# Altium PCB STM32F302VC_EVM.PcbDoc (part 15 of 19)
Units mil, origin at the board's own origin, x right, y up, seen from the top; angles counter-clockwise.
Board outline 3937.01 x 3937.01 mil, 2 copper layers (Top Layer, Bottom Layer); 117 components, 166 nets, 602 pads, 373 vias.
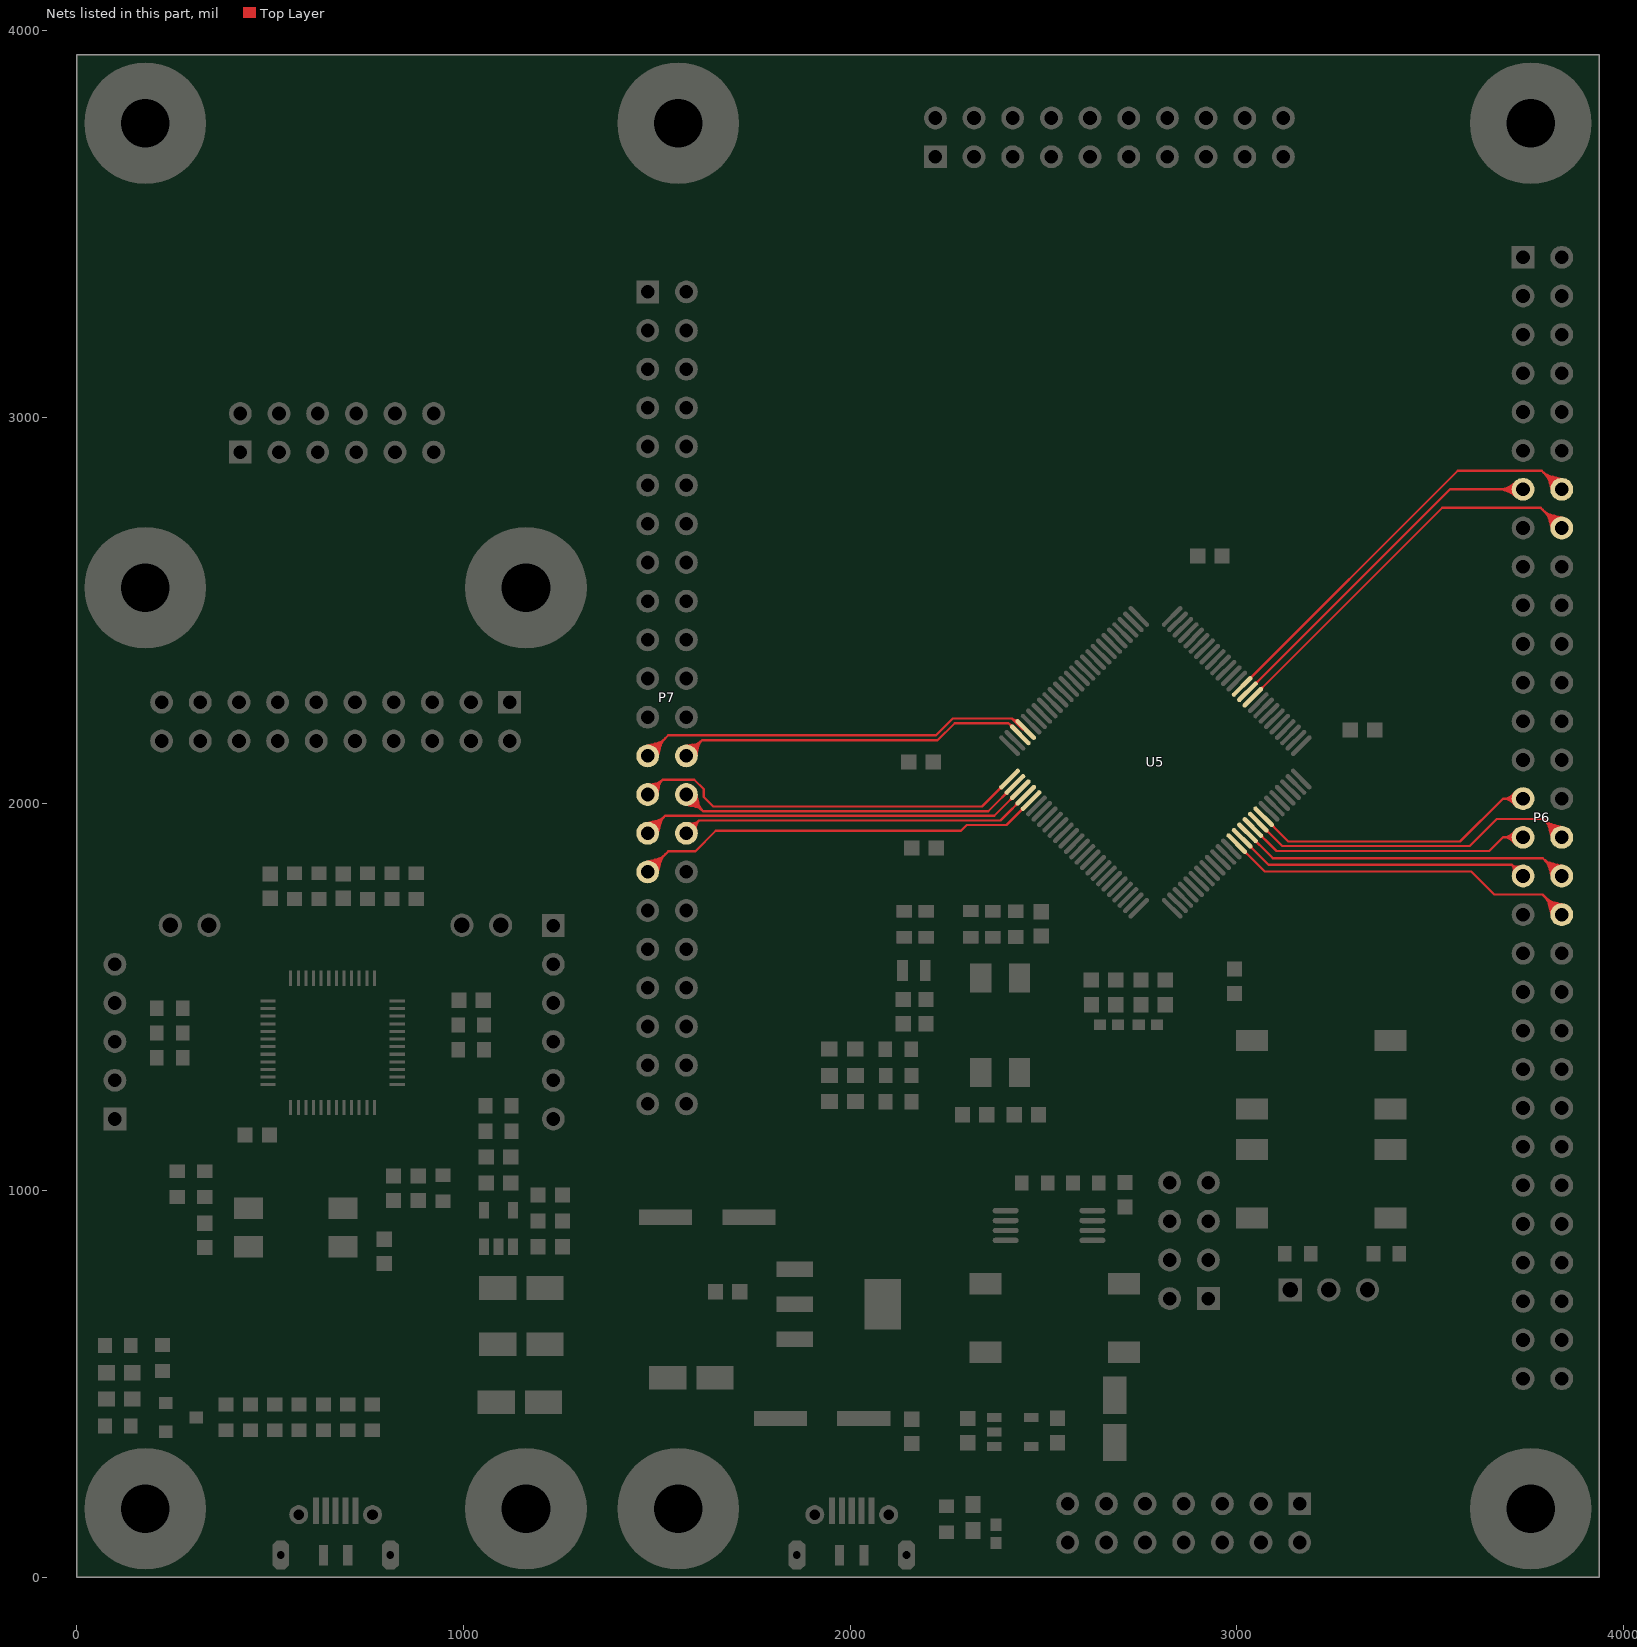
[diagram p15: the nets of this part, all layers, seen from the top]

## Via types
v1: diameter 23.62, hole 11.81, Top Layer to Bottom Layer, tented both sides, 372 vias
v2: diameter 50, hole 28, Top Layer to Bottom Layer, tented both sides, 1 vias

## Nets (pads, with @x,y where several pads share a name; then routed paths per layer and width w, separated by ;. In a path a pad name is that pad's centre, name@x,y a point inside that pad or via, vN(x,y) a via of type N, cw(c..) or ccw(c..) an arc to the next point about the centre after c; other vN are vias at no path point) (continued)
PD13: P6.16 U5.60 | length 2962.9
  Top Layer w6: U5.60@3041.31,2275.71 3531.35,2765.75 3785.43,2765.75 P6.16@3838.98,2712.2 ; U5.60@3062.19,2299.49 ccw(c3062.19,2306.51) 3067.15,2301.55 ; U5.60@3062.19,2299.49 ccw(c3062.19,2306.51) 3067.15,2301.55 ; U5.60@3062.19,2299.49 ccw(c3062.19,2306.51) 3067.15,2301.55 ; U5.60@3065.1,2296.59 cw(c3072.11,2296.59) 3067.15,2301.55 ; U5.60@3065.1,2296.59 cw(c3072.11,2296.59) 3067.15,2301.55 ; U5.60@3065.1,2296.59 cw(c3072.11,2296.59) 3067.15,2301.55 ; 3790.84,2760.34 ccw(c3840.16,2809.66) P6.16@3840.16,2739.91 ; 3790.84,2760.34 ccw(c3840.16,2809.66) P6.16@3840.16,2739.91 ; 3790.84,2760.34 ccw(c3840.16,2809.66) P6.16@3840.16,2739.91 ; 3796.54,2754.64 cw(c3755.29,2713.39) P6.16@3813.63,2713.39 ; 3796.54,2754.64 cw(c3755.29,2713.39) P6.16@3813.63,2713.39 ; 3796.54,2754.64 cw(c3755.29,2713.39) P6.16@3813.63,2713.39 ; 3801.08,2750.1 ccw(c3840.16,2789.17) P6.16@3840.16,2733.91 ; 3801.08,2750.1 ccw(c3840.16,2789.17) P6.16@3840.16,2733.91 ; 3801.08,2750.1 ccw(c3840.16,2789.17) P6.16@3840.16,2733.91 ; 3806.45,2740.17 ccw(c3846.6,2750.92) P6.16@3839.57,2709.96 ; 3806.45,2740.17 ccw(c3846.6,2750.92) P6.16@3839.57,2709.96 ; 3806.45,2740.17 ccw(c3846.6,2750.92) P6.16@3839.57,2709.96 ; 3806.79,2744.4 cw(c3775.78,2713.39) P6.16@3819.63,2713.39 ; 3806.79,2744.4 cw(c3775.78,2713.39) P6.16@3819.63,2713.39 ; 3806.79,2744.4 cw(c3775.78,2713.39) P6.16@3819.63,2713.39 ; 3808.88,2731.12 ccw(c3844.85,2740.76) P6.16@3838.56,2704.05 ; 3808.88,2731.12 ccw(c3844.85,2740.76) P6.16@3838.56,2704.05 ; 3808.88,2731.12 ccw(c3844.85,2740.76) P6.16@3838.56,2704.05 ; 3810.95,2747.74 cw(c3799.15,2703.68) P6.16@3843.54,2714.19 ; 3810.95,2747.74 cw(c3799.15,2703.68) P6.16@3843.54,2714.19 ; 3810.95,2747.74 cw(c3799.15,2703.68) P6.16@3843.54,2714.19 ; 3811.3,2722.07 ccw(c3843.11,2730.59) P6.16@3837.54,2698.14 ; 3811.3,2722.07 ccw(c3843.11,2730.59) P6.16@3837.54,2698.14 ; 3811.3,2722.07 ccw(c3843.11,2730.59) P6.16@3837.54,2698.14 ; 3811.33,2739.86 ccw(c3840.16,2768.69) P6.16@3840.16,2727.91 ; 3811.33,2739.86 ccw(c3840.16,2768.69) P6.16@3840.16,2727.91 ; 3811.33,2739.86 ccw(c3840.16,2768.69) P6.16@3840.16,2727.91 ; 3813.22,2737.3 ccw(c3841.11,2744.77) P6.16@3840.23,2715.91 ; 3813.22,2737.3 ccw(c3841.11,2744.77) P6.16@3840.23,2715.91 ; 3813.22,2737.3 ccw(c3841.11,2744.77) P6.16@3840.23,2715.91 ; 3813.49,2741.06 cw(c3804.98,2709.29) P6.16@3837.65,2713.09 ; 3813.49,2741.06 cw(c3804.98,2709.29) P6.16@3837.65,2713.09 ; 3813.49,2741.06 cw(c3804.98,2709.29) P6.16@3837.65,2713.09 ; 3815.31,2729.5 ccw(c3840.86,2736.35) P6.16@3840.05,2709.91 ; 3815.31,2729.5 ccw(c3840.86,2736.35) P6.16@3840.05,2709.91 ; 3815.31,2729.5 ccw(c3840.86,2736.35) P6.16@3840.05,2709.91 ; 3817.03,2734.15 cw(c3796.26,2713.39) P6.16@3825.63,2713.39 ; 3817.03,2734.15 cw(c3796.26,2713.39) P6.16@3825.63,2713.39 ; 3817.03,2734.15 cw(c3796.26,2713.39) P6.16@3825.63,2713.39 ; 3820.66,2745.14 cw(c3810.25,2706.31) P6.16@3849.38,2715.57 ; 3820.66,2745.14 cw(c3810.25,2706.31) P6.16@3849.38,2715.57 ; 3820.66,2745.14 cw(c3810.25,2706.31) P6.16@3849.38,2715.57 ; 3822.03,2738.77 cw(c3814.42,2710.39) P6.16@3843.61,2713.79 ; 3822.03,2738.77 cw(c3814.42,2710.39) P6.16@3843.61,2713.79 ; 3822.03,2738.77 cw(c3814.42,2710.39) P6.16@3843.61,2713.79 ; 3830.37,2742.54 cw(c3821.36,2708.94) P6.16@3855.21,2716.95 ; 3830.37,2742.54 cw(c3821.36,2708.94) P6.16@3855.21,2716.95 ; 3830.37,2742.54 cw(c3821.36,2708.94) P6.16@3855.21,2716.95
PD14: P6.13 U5.61 | length 1663.4
  Top Layer w6: U5.61@3027.39,2289.63 3551.15,2813.39 P6.13@3740.16,2813.39 ; U5.61@3048.27,2313.41 ccw(c3048.27,2320.43) 3053.23,2315.47 ; U5.61@3048.27,2313.41 ccw(c3048.27,2320.43) 3053.23,2315.47 ; U5.61@3048.27,2313.41 ccw(c3048.27,2320.43) 3053.23,2315.47 ; U5.61@3051.18,2310.51 cw(c3058.19,2310.51) 3053.23,2315.47 ; U5.61@3051.18,2310.51 cw(c3058.19,2310.51) 3053.23,2315.47 ; U5.61@3051.18,2310.51 cw(c3058.19,2310.51) 3053.23,2315.47 ; 3676.11,2813.39 cw(c3676.11,2749.34) P6.13@3721.4,2794.63 ; 3676.11,2813.39 ccw(c3676.11,2877.43) P6.13@3721.4,2832.14 ; 3676.11,2813.39 ccw(c3676.11,2877.43) P6.13@3721.4,2832.14 ; 3676.11,2813.39 cw(c3676.11,2749.34) P6.13@3721.4,2794.63 ; 3676.11,2813.39 ccw(c3676.11,2877.43) P6.13@3721.4,2832.14 ; 3676.11,2813.39 cw(c3676.11,2749.34) P6.13@3721.4,2794.63 ; 3690.6,2813.39 cw(c3690.6,2763.83) P6.13@3725.64,2798.87 ; 3690.6,2813.39 ccw(c3690.6,2862.94) P6.13@3725.64,2827.9 ; 3690.6,2813.39 ccw(c3690.6,2862.94) P6.13@3725.64,2827.9 ; 3690.6,2813.39 cw(c3690.6,2763.83) P6.13@3725.64,2798.87 ; 3690.6,2813.39 ccw(c3690.6,2862.94) P6.13@3725.64,2827.9 ; 3690.6,2813.39 cw(c3690.6,2763.83) P6.13@3725.64,2798.87 ; 3705.09,2813.39 cw(c3705.09,2778.31) P6.13@3729.89,2803.11 ; 3705.09,2813.39 ccw(c3705.09,2848.46) P6.13@3729.89,2823.66 ; 3705.09,2813.39 ccw(c3705.09,2848.46) P6.13@3729.89,2823.66 ; 3705.09,2813.39 cw(c3705.09,2778.31) P6.13@3729.89,2803.11 ; 3705.09,2813.39 ccw(c3705.09,2848.46) P6.13@3729.89,2823.66 ; 3705.09,2813.39 cw(c3705.09,2778.31) P6.13@3729.89,2803.11
PD15: P6.14 U5.62 | length 2829.5
  Top Layer w6: U5.62@3013.47,2303.55 3571.15,2861.22 3788.39,2861.22 ; P6.14@3838.19,2811.42 3788.39,2861.22 ; U5.62@3034.35,2327.33 ccw(c3034.35,2334.35) 3039.31,2329.39 ; U5.62@3034.35,2327.33 ccw(c3034.35,2334.35) 3039.31,2329.39 ; U5.62@3034.35,2327.33 ccw(c3034.35,2334.35) 3039.31,2329.39 ; U5.62@3037.26,2324.43 cw(c3044.27,2324.43) 3039.31,2329.39 ; U5.62@3037.26,2324.43 cw(c3044.27,2324.43) 3039.31,2329.39 ; U5.62@3037.26,2324.43 cw(c3044.27,2324.43) 3039.31,2329.39 ; 3788.39,2861.22 ccw(c3839.82,2912.65) P6.14@3840.07,2839.91 ; 3788.39,2861.22 ccw(c3839.82,2912.65) P6.14@3840.07,2839.91 ; 3788.39,2861.22 ccw(c3839.82,2912.65) P6.14@3840.07,2839.91 ; 3797.66,2851.95 cw(c3759.09,2813.39) P6.14@3813.63,2813.39 ; 3797.66,2851.95 cw(c3759.09,2813.39) P6.14@3813.63,2813.39 ; 3797.66,2851.95 cw(c3759.09,2813.39) P6.14@3813.63,2813.39 ; 3798.58,2851.02 ccw(c3839.89,2892.33) P6.14@3840.09,2833.91 ; 3798.58,2851.02 ccw(c3839.89,2892.33) P6.14@3840.09,2833.91 ; 3798.58,2851.02 ccw(c3839.89,2892.33) P6.14@3840.09,2833.91 ; 3806.67,2839.36 ccw(c3845.57,2849.78) P6.14@3839.65,2809.95 ; 3806.67,2839.36 ccw(c3845.57,2849.78) P6.14@3839.65,2809.95 ; 3806.67,2839.36 ccw(c3845.57,2849.78) P6.14@3839.65,2809.95 ; 3807.9,2841.71 cw(c3779.58,2813.39) P6.14@3819.63,2813.39 ; 3807.9,2841.71 cw(c3779.58,2813.39) P6.14@3819.63,2813.39 ; 3807.9,2841.71 cw(c3779.58,2813.39) P6.14@3819.63,2813.39 ; 3808.78,2840.83 ccw(c3839.96,2872.01) P6.14@3840.11,2827.91 ; 3808.78,2840.83 ccw(c3839.96,2872.01) P6.14@3840.11,2827.91 ; 3808.78,2840.83 ccw(c3839.96,2872.01) P6.14@3840.11,2827.91 ; 3809.04,2830.53 ccw(c3844.1,2839.92) P6.14@3838.76,2804.02 ; 3809.04,2830.53 ccw(c3844.1,2839.92) P6.14@3838.76,2804.02 ; 3809.04,2830.53 ccw(c3844.1,2839.92) P6.14@3838.76,2804.02 ; 3809.92,2847.88 cw(c3797.84,2802.22) P6.14@3843.52,2814.27 ; 3809.92,2847.88 cw(c3797.84,2802.22) P6.14@3843.52,2814.27 ; 3809.92,2847.88 cw(c3797.84,2802.22) P6.14@3843.52,2814.27 ; 3811.4,2821.7 ccw(c3842.64,2830.07) P6.14@3837.88,2798.08 ; 3811.4,2821.7 ccw(c3842.64,2830.07) P6.14@3837.88,2798.08 ; 3811.4,2821.7 ccw(c3842.64,2830.07) P6.14@3837.88,2798.08 ; 3812.39,2841.24 cw(c3803.58,2807.92) P6.14@3837.66,2813.01 ; 3812.39,2841.24 cw(c3803.58,2807.92) P6.14@3837.66,2813.01 ; 3812.39,2841.24 cw(c3803.58,2807.92) P6.14@3837.66,2813.01 ; 3816.17,2834.24 cw(c3810.86,2814.15) P6.14@3831.63,2813.61 ; 3816.17,2834.24 cw(c3810.86,2814.15) P6.14@3831.63,2813.61 ; 3816.17,2834.24 cw(c3810.86,2814.15) P6.14@3831.63,2813.61 ; 3819.88,2845.25 cw(c3809.3,2805.24) P6.14@3849.32,2815.8 ; 3819.88,2845.25 cw(c3809.3,2805.24) P6.14@3849.32,2815.8 ; 3819.88,2845.25 cw(c3809.3,2805.24) P6.14@3849.32,2815.8 ; 3821.2,2838.91 cw(c3813.4,2809.39) P6.14@3843.59,2813.9 ; 3821.2,2838.91 cw(c3813.4,2809.39) P6.14@3843.59,2813.9 ; 3821.2,2838.91 cw(c3813.4,2809.39) P6.14@3843.59,2813.9 ; 3829.85,2842.62 cw(c3820.77,2808.27) P6.14@3855.12,2817.33 ; 3829.85,2842.62 cw(c3820.77,2808.27) P6.14@3855.12,2817.33 ; 3829.85,2842.62 cw(c3820.77,2808.27) P6.14@3855.12,2817.33
PE0: P7.25 U5.97 | length 2981.8
  Top Layer w6: P7.25@1476.38,2124.02 1529.53,2177.17 2221.7,2177.17 2265.19,2220.66 2418.68,2220.66 ; U5.97@2453.91,2192.19 2447.15,2192.19 2418.68,2220.66 ; P7.25@1461.22,2127.12 cw(c1494.37,2120.33) 1485.61,2153.02 ; P7.25@1461.22,2127.12 cw(c1494.37,2120.33) 1485.61,2153.02 ; P7.25@1461.22,2127.12 cw(c1494.37,2120.33) 1485.61,2153.02 ; P7.25@1467.1,2125.92 cw(c1505.01,2118.15) 1494.99,2155.53 ; P7.25@1467.1,2125.92 cw(c1505.01,2118.15) 1494.99,2155.53 ; P7.25@1467.1,2125.92 cw(c1505.01,2118.15) 1494.99,2155.53 ; P7.25@1472.92,2124.27 cw(c1500.72,2122.2) 1493.5,2149.13 ; P7.25@1472.92,2124.27 cw(c1500.72,2122.2) 1493.5,2149.13 ; P7.25@1472.92,2124.27 cw(c1500.72,2122.2) 1493.5,2149.13 ; P7.25@1472.98,2124.71 cw(c1515.64,2115.98) 1504.37,2158.04 ; P7.25@1472.98,2124.71 cw(c1515.64,2115.98) 1504.37,2158.04 ; P7.25@1472.98,2124.71 cw(c1515.64,2115.98) 1504.37,2158.04 ; P7.25@1476.19,2126.54 ccw(c1473.9,2157.29) 1503.68,2149.31 ; P7.25@1476.19,2126.54 ccw(c1473.9,2157.29) 1503.68,2149.31 ; P7.25@1476.19,2126.54 ccw(c1473.9,2157.29) 1503.68,2149.31 ; P7.25@1476.38,2138.54 ccw(c1476.38,2173.62) 1501.18,2148.82 ; P7.25@1476.38,2138.54 ccw(c1476.38,2173.62) 1501.18,2148.82 ; P7.25@1476.38,2138.54 ccw(c1476.38,2173.62) 1501.18,2148.82 ; P7.25@1476.38,2144.54 ccw(c1476.38,2194.1) 1511.42,2159.06 ; P7.25@1476.38,2144.54 ccw(c1476.38,2194.1) 1511.42,2159.06 ; P7.25@1476.38,2144.54 ccw(c1476.38,2194.1) 1511.42,2159.06 ; P7.25@1476.38,2150.54 ccw(c1476.38,2214.59) 1521.66,2169.3 ; P7.25@1476.38,2150.54 ccw(c1476.38,2214.59) 1521.66,2169.3 ; P7.25@1476.38,2150.54 ccw(c1476.38,2214.59) 1521.66,2169.3 ; P7.25@1476.64,2120.55 ccw(c1474.56,2148.36) 1501.49,2141.14 ; P7.25@1476.64,2120.55 ccw(c1474.56,2148.36) 1501.49,2141.14 ; P7.25@1476.64,2120.55 ccw(c1474.56,2148.36) 1501.49,2141.14 ; P7.25@1477.07,2120.61 ccw(c1468.34,2163.28) 1510.41,2152.01 ; P7.25@1477.07,2120.61 ccw(c1468.34,2163.28) 1510.41,2152.01 ; P7.25@1477.07,2120.61 ccw(c1468.34,2163.28) 1510.41,2152.01 ; P7.25@1478.28,2114.74 ccw(c1470.52,2152.65) 1507.89,2142.63 ; P7.25@1478.28,2114.74 ccw(c1470.52,2152.65) 1507.89,2142.63 ; P7.25@1478.28,2114.74 ccw(c1470.52,2152.65) 1507.89,2142.63 ; P7.25@1478.9,2123.83 cw(c1509.65,2121.53) 1501.67,2151.32 ; P7.25@1478.9,2123.83 cw(c1509.65,2121.53) 1501.67,2151.32 ; P7.25@1478.9,2123.83 cw(c1509.65,2121.53) 1501.67,2151.32 ; P7.25@1479.48,2108.86 ccw(c1472.69,2142.01) 1505.38,2133.25 ; P7.25@1479.48,2108.86 ccw(c1472.69,2142.01) 1505.38,2133.25 ; P7.25@1479.48,2108.86 ccw(c1472.69,2142.01) 1505.38,2133.25 ; P7.25@1490.91,2124.02 cw(c1525.98,2124.02) 1501.18,2148.82 ; P7.25@1490.91,2124.02 cw(c1525.98,2124.02) 1501.18,2148.82 ; P7.25@1490.91,2124.02 cw(c1525.98,2124.02) 1501.18,2148.82 ; P7.25@1496.91,2124.02 cw(c1546.46,2124.02) 1511.42,2159.06 ; P7.25@1496.91,2124.02 cw(c1546.46,2124.02) 1511.42,2159.06 ; P7.25@1496.91,2124.02 cw(c1546.46,2124.02) 1511.42,2159.06 ; P7.25@1502.91,2124.02 cw(c1566.95,2124.02) 1521.66,2169.3 ; P7.25@1502.91,2124.02 cw(c1566.95,2124.02) 1521.66,2169.3 ; P7.25@1502.91,2124.02 cw(c1566.95,2124.02) 1521.66,2169.3 ; 2418.68,2220.66 ccw(c2430.42,2232.4) U5.97@2432.64,2215.95 ; 2418.68,2220.66 ccw(c2430.42,2232.4) U5.97@2432.64,2215.95 ; 2418.68,2220.66 ccw(c2430.42,2232.4) U5.97@2432.64,2215.95
PE1: P7.26 U5.98 | length 2027.8
  Top Layer w6: P7.26@1576.38,2124.02 1616.73,2164.37 ; U5.98@2439.99,2178.27 2409.6,2208.66 2270.16,2208.66 2225.87,2164.37 1616.73,2164.37 ; P7.26@1562.39,2130.63 cw(c1598.22,2113.69) 1591.25,2152.7 ; P7.26@1562.39,2130.63 cw(c1598.22,2113.69) 1591.25,2152.7 ; P7.26@1562.39,2130.63 cw(c1598.22,2113.69) 1591.25,2152.7 ; P7.26@1567.81,2128.07 cw(c1611.13,2107.58) 1602.7,2154.75 ; P7.26@1567.81,2128.07 cw(c1611.13,2107.58) 1602.7,2154.75 ; P7.26@1567.81,2128.07 cw(c1611.13,2107.58) 1602.7,2154.75 ; P7.26@1577.61,2138.49 ccw(c1579.84,2164.75) 1598.48,2146.11 ; P7.26@1577.61,2138.49 ccw(c1579.84,2164.75) 1598.48,2146.11 ; P7.26@1577.61,2138.49 ccw(c1579.84,2164.75) 1598.48,2146.11 ; P7.26@1578.12,2144.47 ccw(c1581.27,2181.57) 1607.6,2155.24 ; P7.26@1578.12,2144.47 ccw(c1581.27,2181.57) 1607.6,2155.24 ; P7.26@1578.12,2144.47 ccw(c1581.27,2181.57) 1607.6,2155.24 ; P7.26@1578.63,2150.45 ccw(c1582.71,2198.39) 1616.73,2164.37 ; P7.26@1578.63,2150.45 ccw(c1582.71,2198.39) 1616.73,2164.37 ; P7.26@1578.63,2150.45 ccw(c1582.71,2198.39) 1616.73,2164.37 ; P7.26@1580.43,2115.45 ccw(c1559.95,2158.77) 1607.11,2150.34 ; P7.26@1580.43,2115.45 ccw(c1559.95,2158.77) 1607.11,2150.34 ; P7.26@1580.43,2115.45 ccw(c1559.95,2158.77) 1607.11,2150.34 ; P7.26@1582.99,2110.03 ccw(c1566.05,2145.86) 1605.07,2138.88 ; P7.26@1582.99,2110.03 ccw(c1566.05,2145.86) 1605.07,2138.88 ; P7.26@1582.99,2110.03 ccw(c1566.05,2145.86) 1605.07,2138.88 ; P7.26@1590.85,2125.25 cw(c1617.11,2127.48) 1598.48,2146.11 ; P7.26@1590.85,2125.25 cw(c1617.11,2127.48) 1598.48,2146.11 ; P7.26@1590.85,2125.25 cw(c1617.11,2127.48) 1598.48,2146.11 ; P7.26@1596.83,2125.76 cw(c1633.93,2128.91) 1607.6,2155.24 ; P7.26@1596.83,2125.76 cw(c1633.93,2128.91) 1607.6,2155.24 ; P7.26@1596.83,2125.76 cw(c1633.93,2128.91) 1607.6,2155.24 ; P7.26@1602.81,2126.26 cw(c1650.76,2130.34) 1616.73,2164.37 ; P7.26@1602.81,2126.26 cw(c1650.76,2130.34) 1616.73,2164.37 ; P7.26@1602.81,2126.26 cw(c1650.76,2130.34) 1616.73,2164.37 ; 2414.15,2204.11 cw(c2409.19,2199.15) U5.98@2416.21,2199.15 ; 2414.15,2204.11 ccw(c2419.11,2209.07) U5.98@2419.11,2202.06 ; 2414.15,2204.11 ccw(c2419.11,2209.07) U5.98@2419.11,2202.06 ; 2414.15,2204.11 cw(c2409.19,2199.15) U5.98@2416.21,2199.15 ; 2414.15,2204.11 ccw(c2419.11,2209.07) U5.98@2419.11,2202.06 ; 2414.15,2204.11 cw(c2409.19,2199.15) U5.98@2416.21,2199.15
PE2: P7.27 U5.1 | length 3830.3
  Top Layer w6: P7.27@1472.91,2024.14 cw(c1500.19,2023.15) 1492.04,2049.21 ; P7.27@1476.07,2032.54 ccw(c1474.86,2065.82) 1506.64,2055.87 ; P7.27@1476.12,2032.54 ccw(c1475.11,2065.49) 1506.55,2055.57 ; P7.27@1476.38,2024.02 1514.91,2062.54 ; P7.27@1476.5,2020.55 ccw(c1475.51,2047.83) 1501.57,2039.67 ; P7.27@1478.9,2023.92 cw(c1509.18,2022.82) 1500.13,2051.74 ; P7.27@1478.9,2023.94 cw(c1508.9,2023.02) 1499.87,2051.64 ; P7.27@1480.86,2044.05 ccw(c1485.29,2063.81) 1496.92,2047.24 ; P7.27@1482.08,2043.74 ccw(c1487.83,2063.62) 1505.96,2053.64 ; P7.27@1482.17,2049.9 ccw(c1489.3,2081.73) 1508.03,2055.04 ccw(c1518.77,2039.74) P7.27@1501.25,2033.24 ; P7.27@1482.18,2043.71 ccw(c1487.96,2063.3) 1505.86,2053.45 ; P7.27@1483.52,2043.26 ccw(c1489.31,2058.87) 1502.93,2049.3 ; P7.27@1484.9,2023.71 cw(c1518.18,2022.5) 1508.23,2054.28 ; P7.27@1484.9,2023.76 cw(c1517.85,2022.75) 1507.93,2054.18 ; P7.27@1484.99,2049.11 ccw(c1491.73,2068.78) 1506.21,2053.84 ; P7.27@1485.13,2049.06 ccw(c1491.85,2068.28) 1506.19,2053.83 ; P7.27@1485.55,2048.91 ccw(c1492.17,2066.87) 1505.92,2053.55 ; P7.27@1485.6,2048.89 ccw(c1492.1,2066.41) 1507.4,2055.67 ccw(c1534.09,2036.93) P7.27@1502.27,2029.81 ; P7.27@1495.62,2031.15 cw(c1511.23,2036.94) 1501.67,2050.57 ; P7.27@1496.07,2029.83 cw(c1515.65,2035.6) 1505.79,2053.48 ; P7.27@1496.41,2028.5 cw(c1516.17,2032.92) 1499.6,2044.56 ; P7.27@1501.27,2033.19 cw(c1519.24,2039.81) 1505.91,2053.56 ; P7.27@1501.31,2033.07 cw(c1519.63,2039.71) 1505.9,2053.54 ; P7.27@1501.34,2032.98 cw(c1519.91,2039.65) 1505.91,2053.54 ; P7.27@1501.42,2032.77 cw(c1520.65,2039.48) 1506.19,2053.83 ; P7.27@1501.47,2032.62 cw(c1521.15,2039.37) 1506.21,2053.84 ; 1504,2047.51 cw(c1475.38,2056.54) 1476.3,2026.54 ccw(c1475.19,2056.82) 1504.1,2047.77 ; 1505.98,2053.59 ccw(c1515.96,2035.47) P7.27@1496.1,2029.72 ; U5.1@2412.15,2064.13 2341.09,1993.07 1645.71,1993.07 1621.06,2017.72 1621.06,2038.39 1596.91,2062.54 1514.91,2062.54 ; P7.27@1463.55,2032.67 cw(c1501.91,2006.78) 1495.4,2052.6 ; P7.27@1463.55,2032.67 cw(c1501.91,2006.78) 1495.4,2052.6 ; P7.27@1463.55,2032.67 cw(c1501.91,2006.78) 1495.4,2052.6 ; P7.27@1478.13,2038.44 ccw(c1480.95,2061.64) 1497.48,2045.11 ; P7.27@1478.13,2038.44 ccw(c1480.95,2061.64) 1497.48,2045.11 ; P7.27@1478.13,2038.44 ccw(c1480.95,2061.64) 1497.48,2045.11 ; P7.27@1478.85,2044.39 ccw(c1482.83,2077.19) 1506.19,2053.83 ; P7.27@1478.85,2044.39 ccw(c1482.83,2077.19) 1506.19,2053.83 ; P7.27@1478.85,2044.39 ccw(c1482.83,2077.19) 1506.19,2053.83 ; P7.27@1479.58,2050.35 ccw(c1484.72,2092.73) 1514.9,2062.54 ; P7.27@1479.58,2050.35 ccw(c1484.72,2092.73) 1514.9,2062.54 ; P7.27@1479.58,2050.35 ccw(c1484.72,2092.73) 1514.9,2062.54 ; P7.27@1480.41,2037.97 ccw(c1485.7,2056.31) 1502.47,2047.21 ; P7.27@1480.41,2037.97 ccw(c1485.7,2056.31) 1502.47,2047.21 ; P7.27@1480.41,2037.97 ccw(c1485.7,2056.31) 1502.47,2047.21 ; P7.27@1482.07,2043.74 ccw(c1487.82,2063.65) 1506.03,2053.76 ; P7.27@1482.07,2043.74 ccw(c1487.82,2063.65) 1506.03,2053.76 ; P7.27@1482.07,2043.74 ccw(c1487.82,2063.65) 1506.03,2053.76 ; P7.27@1483.92,2049.45 ccw(c1490.6,2072) 1501.82,2051.33 ; P7.27@1483.92,2049.45 ccw(c1490.6,2072) 1501.82,2051.33 ; P7.27@1483.92,2049.45 ccw(c1490.6,2072) 1501.82,2051.33 ; P7.27@1485.04,2011.19 ccw(c1459.14,2049.54) 1504.96,2043.04 ; P7.27@1485.04,2011.19 ccw(c1459.14,2049.54) 1504.96,2043.04 ; P7.27@1485.04,2011.19 ccw(c1459.14,2049.54) 1504.96,2043.04 ; P7.27@1485.1,2049.07 ccw(c1491.83,2068.37) 1506.19,2053.83 ; P7.27@1485.1,2049.07 ccw(c1491.83,2068.37) 1506.19,2053.83 ; P7.27@1485.1,2049.07 ccw(c1491.83,2068.37) 1506.19,2053.83 ; P7.27@1485.24,2049.02 ccw(c1491.93,2067.91) 1506.19,2053.83 ; P7.27@1485.24,2049.02 ccw(c1491.93,2067.91) 1506.19,2053.83 ; P7.27@1485.24,2049.02 ccw(c1491.93,2067.91) 1506.19,2053.83 ; P7.27@1485.32,2048.99 ccw(c1491.99,2067.63) 1505.9,2053.55 ; P7.27@1485.32,2048.99 ccw(c1491.99,2067.63) 1505.9,2053.55 ; P7.27@1485.32,2048.99 ccw(c1491.99,2067.63) 1505.9,2053.55 ; P7.27@1485.45,2048.94 ccw(c1492.1,2067.19) 1505.91,2053.54 ; P7.27@1485.45,2048.94 ccw(c1492.1,2067.19) 1505.91,2053.54 ; P7.27@1485.43,2048.95 ccw(c1492.08,2067.27) 1505.91,2053.54 ; P7.27@1485.45,2048.94 ccw(c1492.1,2067.19) 1505.91,2053.54 ; P7.27@1490.34,2028.04 cw(c1508.67,2033.34) 1499.57,2050.11 ; P7.27@1490.34,2028.04 cw(c1508.67,2033.34) 1499.57,2050.11 ; P7.27@1490.34,2028.04 cw(c1508.67,2033.34) 1499.57,2050.11 ; P7.27@1490.8,2025.77 cw(c1514.01,2028.58) 1497.48,2045.11 ; P7.27@1490.8,2025.77 cw(c1514.01,2028.58) 1497.48,2045.11 ; P7.27@1490.8,2025.77 cw(c1514.01,2028.58) 1497.48,2045.11 ; P7.27@1496.1,2029.71 cw(c1516.01,2035.45) 1506.13,2053.67 ; P7.27@1496.1,2029.71 cw(c1516.01,2035.45) 1506.13,2053.67 ; P7.27@1496.1,2029.71 cw(c1516.01,2035.45) 1506.13,2053.67 ; P7.27@1496.76,2026.49 cw(c1529.55,2030.47) 1506.19,2053.83 ; P7.27@1496.76,2026.49 cw(c1529.55,2030.47) 1506.19,2053.83 ; P7.27@1496.76,2026.49 cw(c1529.55,2030.47) 1506.19,2053.83 ; P7.27@1501.3,2033.09 cw(c1519.55,2039.73) 1505.9,2053.55 ; P7.27@1501.3,2033.09 cw(c1519.55,2039.73) 1505.9,2053.55 ; P7.27@1501.3,2033.09 cw(c1519.55,2039.73) 1505.9,2053.55 ; P7.27@1501.35,2032.97 cw(c1519.96,2039.64) 1506.21,2053.84 ; P7.27@1501.35,2032.96 cw(c1520,2039.63) 1505.91,2053.54 ; P7.27@1501.35,2032.96 cw(c1520,2039.63) 1505.91,2053.54 ; P7.27@1501.35,2032.96 cw(c1520,2039.63) 1505.91,2053.54 ; P7.27@1501.38,2032.87 cw(c1520.28,2039.57) 1506.19,2053.83 ; P7.27@1501.39,2032.85 cw(c1520.36,2039.55) 1506.19,2053.83 ; P7.27@1501.38,2032.87 cw(c1520.28,2039.57) 1506.19,2053.83 ; P7.27@1501.4,2032.84 cw(c1520.4,2039.54) 1505.92,2053.55 ; P7.27@1501.38,2032.87 cw(c1520.28,2039.57) 1506.19,2053.83 ; P7.27@1501.43,2032.74 cw(c1520.73,2039.46) 1506.19,2053.83 ; P7.27@1501.43,2032.74 cw(c1520.73,2039.46) 1506.19,2053.83 ; P7.27@1501.43,2032.74 cw(c1520.73,2039.46) 1506.19,2053.83 ; P7.27@1501.81,2031.55 cw(c1524.36,2038.24) 1503.69,2049.46 ; P7.27@1501.81,2031.55 cw(c1524.36,2038.24) 1503.69,2049.46 ; P7.27@1501.81,2031.55 cw(c1524.36,2038.24) 1503.69,2049.46 ; P7.27@1502.71,2027.21 cw(c1545.09,2032.36) 1514.9,2062.54 ; P7.27@1502.71,2027.21 cw(c1545.09,2032.36) 1514.9,2062.54 ; P7.27@1502.71,2027.21 cw(c1545.09,2032.36) 1514.9,2062.54 ; 1505.9,2053.54 cw(c1492.01,2067.54) 1485.34,2048.98 ccw(c1492,2067.59) 1506.21,2053.84 ; 1505.92,2053.56 cw(c1491.9,2068.03) 1485.2,2049.03 ccw(c1491.91,2068) 1506.19,2053.83 ; 2386.31,2038.29 cw(c2391.27,2033.33) U5.1@2391.27,2040.35 ; 2386.31,2038.29 ccw(c2381.35,2043.25) U5.1@2388.37,2043.25 ; 2386.31,2038.29 ccw(c2381.35,2043.25) U5.1@2388.37,2043.25 ; 2386.31,2038.29 cw(c2391.27,2033.33) U5.1@2391.27,2040.35 ; 2386.31,2038.29 ccw(c2381.35,2043.25) U5.1@2388.37,2043.25 ; 2386.31,2038.29 cw(c2391.27,2033.33) U5.1@2391.27,2040.35
PE3: P7.28 U5.2 | length 2570.9
  Top Layer w6: P7.28@1576.38,2024.02 1619.32,1981.07 ; U5.2@2426.07,2050.21 2356.93,1981.07 1619.32,1981.07 ; P7.28@1561.56,2019.57 ccw(c1595.53,2029.76) 1587.67,1995.17 ; P7.28@1561.56,2019.57 ccw(c1595.53,2029.76) 1587.67,1995.17 ; P7.28@1561.56,2019.57 ccw(c1595.53,2029.76) 1587.67,1995.17 ; P7.28@1567.3,2021.3 ccw(c1606.86,2033.15) 1597.7,1992.89 ; P7.28@1567.3,2021.3 ccw(c1606.86,2033.15) 1597.7,1992.89 ; P7.28@1567.3,2021.3 ccw(c1606.86,2033.15) 1597.7,1992.89 ; P7.28@1572.95,2023.44 ccw(c1602.41,2028.4) 1595.79,1999.27 ; P7.28@1572.95,2023.44 ccw(c1602.41,2028.4) 1595.79,1999.27 ; P7.28@1572.95,2023.44 ccw(c1602.41,2028.4) 1595.79,1999.27 ; P7.28@1573.05,2023.02 ccw(c1618.18,2036.55) 1607.74,1990.61 ; P7.28@1573.05,2023.02 ccw(c1618.18,2036.55) 1607.74,1990.61 ; P7.28@1573.05,2023.02 ccw(c1618.18,2036.55) 1607.74,1990.61 ; P7.28@1576.93,2009.5 cw(c1578.11,1978.72) 1599.89,2000.5 ; P7.28@1576.93,2009.5 cw(c1578.11,1978.72) 1599.89,2000.5 ; P7.28@1576.93,2009.5 cw(c1578.11,1978.72) 1599.89,2000.5 ; P7.28@1576.95,2027.44 cw(c1571.99,1997.98) 1601.13,2004.6 ; P7.28@1576.95,2027.44 cw(c1571.99,1997.98) 1601.13,2004.6 ; P7.28@1576.95,2027.44 cw(c1571.99,1997.98) 1601.13,2004.6 ; P7.28@1577.16,2003.5 cw(c1578.83,1960.01) 1609.61,1990.79 ; P7.28@1577.16,2003.5 cw(c1578.83,1960.01) 1609.61,1990.79 ; P7.28@1577.16,2003.5 cw(c1578.83,1960.01) 1609.61,1990.79 ; P7.28@1577.39,1997.51 cw(c1579.54,1941.3) 1619.32,1981.07 ; P7.28@1577.39,1997.51 cw(c1579.54,1941.3) 1619.32,1981.07 ; P7.28@1577.39,1997.51 cw(c1579.54,1941.3) 1619.32,1981.07 ; P7.28@1577.38,2027.34 cw(c1563.84,1982.21) 1609.78,1992.66 ; P7.28@1577.38,2027.34 cw(c1563.84,1982.21) 1609.78,1992.66 ; P7.28@1577.38,2027.34 cw(c1563.84,1982.21) 1609.78,1992.66 ; P7.28@1579.1,2033.09 cw(c1567.24,1993.54) 1607.5,2002.69 ; P7.28@1579.1,2033.09 cw(c1567.24,1993.54) 1607.5,2002.69 ; P7.28@1579.1,2033.09 cw(c1567.24,1993.54) 1607.5,2002.69 ; P7.28@1580.82,2038.84 cw(c1570.63,2004.86) 1605.22,2012.72 ; P7.28@1580.82,2038.84 cw(c1570.63,2004.86) 1605.22,2012.72 ; P7.28@1580.82,2038.84 cw(c1570.63,2004.86) 1605.22,2012.72 ; P7.28@1590.89,2023.46 ccw(c1621.68,2022.28) 1599.89,2000.5 ; P7.28@1590.89,2023.46 ccw(c1621.68,2022.28) 1599.89,2000.5 ; P7.28@1590.89,2023.46 ccw(c1621.68,2022.28) 1599.89,2000.5 ; P7.28@1596.89,2023.23 ccw(c1640.39,2021.56) 1609.61,1990.79 ; P7.28@1596.89,2023.23 ccw(c1640.39,2021.56) 1609.61,1990.79 ; P7.28@1596.89,2023.23 ccw(c1640.39,2021.56) 1609.61,1990.79 ; P7.28@1602.89,2023 ccw(c1659.1,2020.85) 1619.32,1981.07 ; P7.28@1602.89,2023 ccw(c1659.1,2020.85) 1619.32,1981.07 ; P7.28@1602.89,2023 ccw(c1659.1,2020.85) 1619.32,1981.07 ; 2400.23,2024.37 cw(c2405.19,2019.41) U5.2@2405.19,2026.43 ; 2400.23,2024.37 ccw(c2395.27,2029.33) U5.2@2402.29,2029.33 ; 2400.23,2024.37 ccw(c2395.27,2029.33) U5.2@2402.29,2029.33 ; 2400.23,2024.37 cw(c2405.19,2019.41) U5.2@2405.19,2026.43 ; 2400.23,2024.37 ccw(c2395.27,2029.33) U5.2@2402.29,2029.33 ; 2400.23,2024.37 cw(c2405.19,2019.41) U5.2@2405.19,2026.43
PE4: P7.29 U5.3 | length 2946.2
  Top Layer w6: P7.29@1476.38,1924.02 1521.43,1969.07 ; U5.3@2439.99,2036.29 2372.77,1969.07 1521.43,1969.07 ; P7.29@1461.24,1927.23 cw(c1494.45,1920.18) 1485.78,1953 ; P7.29@1461.24,1927.23 cw(c1494.45,1920.18) 1485.78,1953 ; P7.29@1461.24,1927.23 cw(c1494.45,1920.18) 1485.78,1953 ; P7.29@1467.11,1925.98 cw(c1505.13,1917.91) 1495.21,1955.49 ; P7.29@1467.11,1925.98 cw(c1505.13,1917.91) 1495.21,1955.49 ; P7.29@1467.11,1925.98 cw(c1505.13,1917.91) 1495.21,1955.49 ; P7.29@1472.92,1924.3 cw(c1500.84,1922.01) 1493.69,1949.09 ; P7.29@1472.92,1924.3 cw(c1500.84,1922.01) 1493.69,1949.09 ; P7.29@1472.92,1924.3 cw(c1500.84,1922.01) 1493.69,1949.09 ; P7.29@1472.98,1924.74 cw(c1515.82,1915.64) 1504.64,1957.98 ; P7.29@1472.98,1924.74 cw(c1515.82,1915.64) 1504.64,1957.98 ; P7.29@1472.98,1924.74 cw(c1515.82,1915.64) 1504.64,1957.98 ; P7.29@1476.17,1926.53 ccw(c1473.63,1957.45) 1503.62,1949.53 ; P7.29@1476.17,1926.53 ccw(c1473.63,1957.45) 1503.62,1949.53 ; P7.29@1476.17,1926.53 ccw(c1473.63,1957.45) 1503.62,1949.53 ; P7.29@1476.43,1938.54 ccw(c1476.56,1973.18) 1501.05,1948.69 ; P7.29@1476.43,1938.54 ccw(c1476.56,1973.18) 1501.05,1948.69 ; P7.29@1476.43,1938.54 ccw(c1476.56,1973.18) 1501.05,1948.69 ; P7.29@1476.45,1944.54 ccw(c1476.63,1993.49) 1511.24,1958.88 ; P7.29@1476.45,1944.54 ccw(c1476.63,1993.49) 1511.24,1958.88 ; P7.29@1476.45,1944.54 ccw(c1476.63,1993.49) 1511.24,1958.88 ; P7.29@1476.47,1950.54 ccw(c1476.71,2013.79) 1521.43,1969.07 ; P7.29@1476.47,1950.54 ccw(c1476.71,2013.79) 1521.43,1969.07 ; P7.29@1476.47,1950.54 ccw(c1476.71,2013.79) 1521.43,1969.07 ; P7.29@1476.66,1920.56 ccw(c1474.37,1948.48) 1501.46,1941.32 ; P7.29@1476.66,1920.56 ccw(c1474.37,1948.48) 1501.46,1941.32 ; P7.29@1476.66,1920.56 ccw(c1474.37,1948.48) 1501.46,1941.32 ; P7.29@1477.1,1920.62 ccw(c1468,1963.46) 1510.34,1952.28 ; P7.29@1477.1,1920.62 ccw(c1468,1963.46) 1510.34,1952.28 ; P7.29@1477.1,1920.62 ccw(c1468,1963.46) 1510.34,1952.28 ; P7.29@1478.35,1914.75 ccw(c1470.27,1952.77) 1507.85,1942.85 ; P7.29@1478.35,1914.75 ccw(c1470.27,1952.77) 1507.85,1942.85 ; P7.29@1478.35,1914.75 ccw(c1470.27,1952.77) 1507.85,1942.85 ; P7.29@1478.9,1923.81 cw(c1509.81,1921.27) 1501.89,1951.26 ; P7.29@1478.9,1923.81 cw(c1509.81,1921.27) 1501.89,1951.26 ; P7.29@1478.9,1923.81 cw(c1509.81,1921.27) 1501.89,1951.26 ; P7.29@1479.59,1908.88 ccw(c1472.54,1942.09) 1505.36,1933.42 ; P7.29@1479.59,1908.88 ccw(c1472.54,1942.09) 1505.36,1933.42 ; P7.29@1479.59,1908.88 ccw(c1472.54,1942.09) 1505.36,1933.42 ; P7.29@1490.91,1924.07 cw(c1525.54,1924.2) 1501.05,1948.69 ; P7.29@1490.91,1924.07 cw(c1525.54,1924.2) 1501.05,1948.69 ; P7.29@1490.91,1924.07 cw(c1525.54,1924.2) 1501.05,1948.69 ; P7.29@1496.91,1924.09 cw(c1545.85,1924.27) 1511.24,1958.88 ; P7.29@1496.91,1924.09 cw(c1545.85,1924.27) 1511.24,1958.88 ; P7.29@1496.91,1924.09 cw(c1545.85,1924.27) 1511.24,1958.88 ; P7.29@1502.91,1924.11 cw(c1566.16,1924.34) 1521.43,1969.07 ; P7.29@1502.91,1924.11 cw(c1566.16,1924.34) 1521.43,1969.07 ; P7.29@1502.91,1924.11 cw(c1566.16,1924.34) 1521.43,1969.07 ; 2414.15,2010.46 cw(c2419.11,2005.5) U5.3@2419.11,2012.51 ; 2414.15,2010.46 ccw(c2409.19,2015.42) U5.3@2416.21,2015.42 ; 2414.15,2010.46 ccw(c2409.19,2015.42) U5.3@2416.21,2015.42 ; 2414.15,2010.46 cw(c2419.11,2005.5) U5.3@2419.11,2012.51 ; 2414.15,2010.46 ccw(c2409.19,2015.42) U5.3@2416.21,2015.42 ; 2414.15,2010.46 cw(c2419.11,2005.5) U5.3@2419.11,2012.51
PE5: P7.30 U5.4 | length 1258.1
  Top Layer w6: P7.30@1576.38,1924.02 1609.43,1957.07 ; U5.4@2453.91,2022.37 2388.61,1957.07 1609.43,1957.07 ; P7.30@1581.4,1943.92 ccw(c1586.68,1964.87) 1601.96,1949.59 ; P7.30@1581.4,1943.92 ccw(c1586.68,1964.87) 1601.96,1949.59 ; P7.30@1581.4,1943.92 ccw(c1586.68,1964.87) 1601.96,1949.59 ; P7.30@1582.86,1949.74 ccw(c1589.69,1976.81) 1609.43,1957.07 ; P7.30@1582.86,1949.74 ccw(c1589.69,1976.81) 1609.43,1957.07 ; P7.30@1582.86,1949.74 ccw(c1589.69,1976.81) 1609.43,1957.07 ; P7.30@1596.28,1929.03 cw(c1617.23,1934.32) 1601.96,1949.59 ; P7.30@1596.28,1929.03 cw(c1617.23,1934.32) 1601.96,1949.59 ; P7.30@1596.28,1929.03 cw(c1617.23,1934.32) 1601.96,1949.59 ; P7.30@1602.1,1930.5 cw(c1629.18,1937.33) 1609.43,1957.07 ; P7.30@1602.1,1930.5 cw(c1629.18,1937.33) 1609.43,1957.07 ; P7.30@1602.1,1930.5 cw(c1629.18,1937.33) 1609.43,1957.07 ; 2428.07,1996.54 cw(c2433.03,1991.58) U5.4@2433.03,1998.59 ; 2428.07,1996.54 ccw(c2423.11,2001.5) U5.4@2430.13,2001.5 ; 2428.07,1996.54 ccw(c2423.11,2001.5) U5.4@2430.13,2001.5 ; 2428.07,1996.54 cw(c2433.03,1991.58) U5.4@2433.03,1998.59 ; 2428.07,1996.54 ccw(c2423.11,2001.5) U5.4@2430.13,2001.5 ; 2428.07,1996.54 cw(c2433.03,1991.58) U5.4@2433.03,1998.59
PE6: P7.31 U5.5 | length 3007.5
  Top Layer w6: P7.31@1476.38,1824.02 1529.33,1876.97 1599.41,1876.97 1652.56,1930.12 2286.42,1930.12 2301.37,1945.07 2404.45,1945.07 U5.5@2467.83,2008.46 ; P7.31@1461.22,1827.12 cw(c1494.37,1820.33) 1485.61,1853.02 ; P7.31@1461.22,1827.12 cw(c1494.37,1820.33) 1485.61,1853.02 ; P7.31@1461.22,1827.12 cw(c1494.37,1820.33) 1485.61,1853.02 ; P7.31@1467.1,1825.92 cw(c1505.01,1818.15) 1494.99,1855.53 ; P7.31@1467.1,1825.92 cw(c1505.01,1818.15) 1494.99,1855.53 ; P7.31@1467.1,1825.92 cw(c1505.01,1818.15) 1494.99,1855.53 ; P7.31@1472.92,1824.27 cw(c1500.72,1822.2) 1493.5,1849.13 ; P7.31@1472.92,1824.27 cw(c1500.72,1822.2) 1493.5,1849.13 ; P7.31@1472.92,1824.27 cw(c1500.72,1822.2) 1493.5,1849.13 ; P7.31@1472.98,1824.71 cw(c1515.64,1815.98) 1504.37,1858.04 ; P7.31@1472.98,1824.71 cw(c1515.64,1815.98) 1504.37,1858.04 ; P7.31@1472.98,1824.71 cw(c1515.64,1815.98) 1504.37,1858.04 ; P7.31@1476.19,1826.54 ccw(c1473.9,1857.29) 1503.68,1849.31 ; P7.31@1476.19,1826.54 ccw(c1473.9,1857.29) 1503.68,1849.31 ; P7.31@1476.19,1826.54 ccw(c1473.9,1857.29) 1503.68,1849.31 ; P7.31@1476.38,1838.54 ccw(c1476.38,1873.62) 1501.18,1848.82 ; P7.31@1476.38,1838.54 ccw(c1476.38,1873.62) 1501.18,1848.82 ; P7.31@1476.38,1838.54 ccw(c1476.38,1873.62) 1501.18,1848.82 ; P7.31@1476.38,1844.54 ccw(c1476.38,1894.1) 1511.42,1859.06 ; P7.31@1476.38,1844.54 ccw(c1476.38,1894.1) 1511.42,1859.06 ; P7.31@1476.38,1844.54 ccw(c1476.38,1894.1) 1511.42,1859.06 ; P7.31@1476.38,1850.54 ccw(c1476.38,1914.59) 1521.66,1869.3 ; P7.31@1476.38,1850.54 ccw(c1476.38,1914.59) 1521.66,1869.3 ; P7.31@1476.38,1850.54 ccw(c1476.38,1914.59) 1521.66,1869.3 ; P7.31@1476.64,1820.55 ccw(c1474.56,1848.36) 1501.49,1841.14 ; P7.31@1476.64,1820.55 ccw(c1474.56,1848.36) 1501.49,1841.14 ; P7.31@1476.64,1820.55 ccw(c1474.56,1848.36) 1501.49,1841.14 ; P7.31@1477.07,1820.61 ccw(c1468.34,1863.28) 1510.41,1852.01 ; P7.31@1477.07,1820.61 ccw(c1468.34,1863.28) 1510.41,1852.01 ; P7.31@1477.07,1820.61 ccw(c1468.34,1863.28) 1510.41,1852.01 ; P7.31@1478.28,1814.74 ccw(c1470.52,1852.65) 1507.89,1842.63 ; P7.31@1478.28,1814.74 ccw(c1470.52,1852.65) 1507.89,1842.63 ; P7.31@1478.28,1814.74 ccw(c1470.52,1852.65) 1507.89,1842.63 ; P7.31@1478.9,1823.83 cw(c1509.65,1821.53) 1501.67,1851.32 ; P7.31@1478.9,1823.83 cw(c1509.65,1821.53) 1501.67,1851.32 ; P7.31@1478.9,1823.83 cw(c1509.65,1821.53) 1501.67,1851.32 ; P7.31@1479.48,1808.86 ccw(c1472.69,1842.01) 1505.38,1833.25 ; P7.31@1479.48,1808.86 ccw(c1472.69,1842.01) 1505.38,1833.25 ; P7.31@1479.48,1808.86 ccw(c1472.69,1842.01) 1505.38,1833.25 ; P7.31@1490.91,1824.02 cw(c1525.98,1824.02) 1501.18,1848.82 ; P7.31@1490.91,1824.02 cw(c1525.98,1824.02) 1501.18,1848.82 ; P7.31@1490.91,1824.02 cw(c1525.98,1824.02) 1501.18,1848.82 ; P7.31@1496.91,1824.02 cw(c1546.46,1824.02) 1511.42,1859.06 ; P7.31@1496.91,1824.02 cw(c1546.46,1824.02) 1511.42,1859.06 ; P7.31@1496.91,1824.02 cw(c1546.46,1824.02) 1511.42,1859.06 ; P7.31@1502.91,1824.02 cw(c1566.95,1824.02) 1521.66,1869.3 ; P7.31@1502.91,1824.02 cw(c1566.95,1824.02) 1521.66,1869.3 ; P7.31@1502.91,1824.02 cw(c1566.95,1824.02) 1521.66,1869.3 ; 2441.99,1982.62 cw(c2446.95,1977.66) U5.5@2446.95,1984.67 ; 2441.99,1982.62 ccw(c2437.03,1987.58) U5.5@2444.05,1987.58 ; 2441.99,1982.62 ccw(c2437.03,1987.58) U5.5@2444.05,1987.58 ; 2441.99,1982.62 cw(c2446.95,1977.66) U5.5@2446.95,1984.67 ; 2441.99,1982.62 ccw(c2437.03,1987.58) U5.5@2444.05,1987.58 ; 2441.99,1982.62 cw(c2446.95,1977.66) U5.5@2446.95,1984.67
PE7: P6.36 U5.38 | length 2857.6
  Top Layer w6: U5.38@2999.55,1897.1 3071.85,1824.8 3606.3,1824.8 3665.35,1765.75 3790.35,1765.75 P6.36@3841.44,1714.67 ; U5.38@3020.43,1873.32 cw(c3020.43,1866.3) 3025.39,1871.26 ; U5.38@3020.43,1873.32 cw(c3020.43,1866.3) 3025.39,1871.26 ; U5.38@3020.43,1873.32 cw(c3020.43,1866.3) 3025.39,1871.26 ; U5.38@3023.34,1876.22 ccw(c3030.35,1876.22) 3025.39,1871.26 ; U5.38@3023.34,1876.22 ccw(c3030.35,1876.22) 3025.39,1871.26 ; U5.38@3023.34,1876.22 ccw(c3030.35,1876.22) 3025.39,1871.26 ; 3793.06,1763.04 cw(c3743.41,1713.39) P6.36@3813.63,1713.39 ; 3793.06,1763.04 cw(c3743.41,1713.39) P6.36@3813.63,1713.39 ; 3793.06,1763.04 cw(c3743.41,1713.39) P6.36@3813.63,1713.39 ; 3799.24,1756.86 ccw(c3840.16,1797.78) P6.36@3840.16,1739.91 ; 3799.24,1756.86 ccw(c3840.16,1797.78) P6.36@3840.16,1739.91 ; 3799.24,1756.86 ccw(c3840.16,1797.78) P6.36@3840.16,1739.91 ; 3803.31,1752.8 cw(c3763.89,1713.39) P6.36@3819.63,1713.39 ; 3803.31,1752.8 cw(c3763.89,1713.39) P6.36@3819.63,1713.39 ; 3803.31,1752.8 cw(c3763.89,1713.39) P6.36@3819.63,1713.39 ; 3805.78,1742.69 ccw(c3850.01,1754.54) P6.36@3839.35,1710.01 ; 3805.78,1742.69 ccw(c3850.01,1754.54) P6.36@3839.35,1710.01 ; 3805.78,1742.69 ccw(c3850.01,1754.54) P6.36@3839.35,1710.01 ; 3808.39,1732.96 ccw(c3847.34,1743.4) P6.36@3837.95,1704.17 ; 3808.39,1732.96 ccw(c3847.34,1743.4) P6.36@3837.95,1704.17 ; 3808.39,1732.96 ccw(c3847.34,1743.4) P6.36@3837.95,1704.17 ; 3809.48,1746.62 ccw(c3840.16,1777.29) P6.36@3840.16,1733.91 ; 3809.48,1746.62 ccw(c3840.16,1777.29) P6.36@3840.16,1733.91 ; 3809.48,1746.62 ccw(c3840.16,1777.29) P6.36@3840.16,1733.91 ; 3810.99,1723.22 ccw(c3844.67,1732.25) P6.36@3836.56,1698.34 ; 3810.99,1723.22 ccw(c3844.67,1732.25) P6.36@3836.56,1698.34 ; 3810.99,1723.22 ccw(c3844.67,1732.25) P6.36@3836.56,1698.34 ; 3812.45,1740.17 ccw(c3844.39,1748.72) P6.36@3840.46,1715.9 ; 3812.45,1740.17 ccw(c3844.39,1748.72) P6.36@3840.46,1715.9 ; 3812.45,1740.17 ccw(c3844.39,1748.72) P6.36@3840.46,1715.9 ; 3813.48,1747.06 cw(c3802.76,1707.08) P6.36@3843.58,1713.96 ; 3813.48,1747.06 cw(c3802.76,1707.08) P6.36@3843.58,1713.96 ; 3813.48,1747.06 cw(c3802.76,1707.08) P6.36@3843.58,1713.96 ; 3813.55,1742.55 cw(c3784.38,1713.39) P6.36@3825.63,1713.39 ; 3813.55,1742.55 cw(c3784.38,1713.39) P6.36@3825.63,1713.39 ; 3813.55,1742.55 cw(c3784.38,1713.39) P6.36@3825.63,1713.39 ; 3814.75,1731.6 ccw(c3843.25,1739.24) P6.36@3839.74,1709.94 ; 3814.75,1731.6 ccw(c3843.25,1739.24) P6.36@3839.74,1709.94 ; 3814.75,1731.6 ccw(c3843.25,1739.24) P6.36@3839.74,1709.94 ; 3816.36,1740.29 cw(c3808.92,1712.55) P6.36@3837.63,1713.32 ; 3816.36,1740.29 cw(c3808.92,1712.55) P6.36@3837.63,1713.32 ; 3816.36,1740.29 cw(c3808.92,1712.55) P6.36@3837.63,1713.32 ; 3819.73,1736.38 ccw(c3840.16,1756.81) P6.36@3840.16,1727.91 ; 3819.73,1736.38 ccw(c3840.16,1756.81) P6.36@3840.16,1727.91 ; 3819.73,1736.38 ccw(c3840.16,1756.81) P6.36@3840.16,1727.91 ; 3822.5,1744.64 cw(c3812.89,1708.79) P6.36@3849.5,1714.96 ; 3822.5,1744.64 cw(c3812.89,1708.79) P6.36@3849.5,1714.96 ; 3822.5,1744.64 cw(c3812.89,1708.79) P6.36@3849.5,1714.96 ; 3824.12,1738.21 cw(c3817.31,1712.78) P6.36@3843.63,1713.48 ; 3824.12,1738.21 cw(c3817.31,1712.78) P6.36@3843.63,1713.48 ; 3824.12,1738.21 cw(c3817.31,1712.78) P6.36@3843.63,1713.48 ; 3831.52,1742.23 cw(c3823.02,1710.49) P6.36@3855.41,1715.96 ; 3831.52,1742.23 cw(c3823.02,1710.49) P6.36@3855.41,1715.96 ; 3831.52,1742.23 cw(c3823.02,1710.49) P6.36@3855.41,1715.96
PE8: P6.33 U5.39 | length 1028.2
  Top Layer w6: U5.39@3013.47,1911.02 3081.97,1842.52 3711.02,1842.52 ; P6.33@3740.16,1813.39 3711.02,1842.52 ; U5.39@3034.35,1887.23 cw(c3034.35,1880.22) 3039.31,1885.18 ; U5.39@3034.35,1887.23 cw(c3034.35,1880.22) 3039.31,1885.18 ; U5.39@3034.35,1887.23 cw(c3034.35,1880.22) 3039.31,1885.18 ; U5.39@3037.26,1890.14 ccw(c3044.27,1890.14) 3039.31,1885.18 ; U5.39@3037.26,1890.14 ccw(c3044.27,1890.14) 3039.31,1885.18 ; U5.39@3037.26,1890.14 ccw(c3044.27,1890.14) 3039.31,1885.18 ; 3711.02,1842.52 cw(c3697.78,1829.27) P6.33@3715.32,1822.7 ; 3711.02,1842.52 ccw(c3724.27,1855.76) P6.33@3730.84,1838.22 ; 3711.02,1842.52 ccw(c3724.27,1855.76) P6.33@3730.84,1838.22 ; 3711.02,1842.52 cw(c3697.78,1829.27) P6.33@3715.32,1822.7 ; 3711.02,1842.52 ccw(c3724.27,1855.76) P6.33@3730.84,1838.22 ; 3711.02,1842.52 cw(c3697.78,1829.27) P6.33@3715.32,1822.7 ; 3717.61,1835.93 cw(c3707.37,1825.68) P6.33@3720.94,1820.59 ; 3717.61,1835.93 ccw(c3727.86,1846.18) P6.33@3732.95,1832.61 ; 3717.61,1835.93 ccw(c3727.86,1846.18) P6.33@3732.95,1832.61 ; 3717.61,1835.93 cw(c3707.37,1825.68) P6.33@3720.94,1820.59 ; 3717.61,1835.93 ccw(c3727.86,1846.18) P6.33@3732.95,1832.61 ; 3717.61,1835.93 cw(c3707.37,1825.68) P6.33@3720.94,1820.59
PE9: P6.34 U5.40 | length 2686
  Top Layer w6: U5.40@3027.39,1924.94 3093.08,1859.25 3791.23,1859.25 ; P6.34@3838.62,1811.85 3791.23,1859.25 ; U5.40@3048.27,1901.15 cw(c3048.27,1894.14) 3053.23,1899.1 ; U5.40@3048.27,1901.15 cw(c3048.27,1894.14) 3053.23,1899.1 ; U5.40@3048.27,1901.15 cw(c3048.27,1894.14) 3053.23,1899.1 ; U5.40@3051.18,1904.06 ccw(c3058.19,1904.06) 3053.23,1899.1 ; U5.40@3051.18,1904.06 ccw(c3058.19,1904.06) 3053.23,1899.1 ; U5.40@3051.18,1904.06 ccw(c3058.19,1904.06) 3053.23,1899.1 ; 3791.23,1859.25 ccw(c3837.97,1905.99) P6.34@3839.53,1839.91 ; 3791.23,1859.25 ccw(c3837.97,1905.99) P6.34@3839.53,1839.91 ; 3791.23,1859.25 ccw(c3837.97,1905.99) P6.34@3839.53,1839.91 ; 3797.04,1853.44 cw(c3756.99,1813.39) P6.34@3813.63,1813.39 ; 3797.04,1853.44 cw(c3756.99,1813.39) P6.34@3813.63,1813.39 ; 3797.04,1853.44 cw(c3756.99,1813.39) P6.34@3813.63,1813.39 ; 3801.14,1849.34 ccw(c3838.43,1886.63) P6.34@3839.67,1833.91 ; 3801.14,1849.34 ccw(c3838.43,1886.63) P6.34@3839.67,1833.91 ; 3801.14,1849.34 ccw(c3838.43,1886.63) P6.34@3839.67,1833.91 ; 3806.55,1839.81 ccw(c3846.13,1850.41) P6.34@3839.6,1809.96 ; 3806.55,1839.81 ccw(c3846.13,1850.41) P6.34@3839.6,1809.96 ; 3806.55,1839.81 ccw(c3846.13,1850.41) P6.34@3839.6,1809.96 ; 3807.28,1843.19 cw(c3777.47,1813.39) P6.34@3819.63,1813.39 ; 3807.28,1843.19 cw(c3777.47,1813.39) P6.34@3819.63,1813.39 ; 3807.28,1843.19 cw(c3777.47,1813.39) P6.34@3819.63,1813.39 ; 3808.75,1847.38 cw(c3797.41,1800.66) P6.34@3843.49,1814.38 ; 3808.75,1847.38 cw(c3797.41,1800.66) P6.34@3843.49,1814.38 ; 3808.75,1847.38 cw(c3797.41,1800.66) P6.34@3843.49,1814.38 ; 3808.95,1830.85 ccw(c3844.51,1840.38) P6.34@3838.65,1804.03 ; 3808.95,1830.85 ccw(c3844.51,1840.38) P6.34@3838.65,1804.03 ; 3808.95,1830.85 ccw(c3844.51,1840.38) P6.34@3838.65,1804.03 ; 3811.05,1839.43 ccw(c3838.89,1867.27) P6.34@3839.81,1827.91 ; 3811.05,1839.43 ccw(c3838.89,1867.27) P6.34@3839.81,1827.91 ; 3811.05,1839.43 ccw(c3838.89,1867.27) P6.34@3839.81,1827.91 ; 3811.35,1821.9 ccw(c3842.9,1830.35) P6.34@3837.69,1798.11 ; 3811.35,1821.9 ccw(c3842.9,1830.35) P6.34@3837.69,1798.11 ; 3811.35,1821.9 ccw(c3842.9,1830.35) P6.34@3837.69,1798.11 ; 3811.55,1840.74 cw(c3803.31,1806.83) P6.34@3837.67,1812.94 ; 3811.55,1840.74 cw(c3803.31,1806.83) P6.34@3837.67,1812.94 ; 3811.55,1840.74 cw(c3803.31,1806.83) P6.34@3837.67,1812.94 ; 3813.33,1836.89 ccw(c3840.68,1844.22) P6.34@3840.2,1815.91 ; 3813.33,1836.89 ccw(c3840.68,1844.22) P6.34@3840.2,1815.91 ; 3813.33,1836.89 ccw(c3840.68,1844.22) P6.34@3840.2,1815.91 ; 3817.53,1832.95 cw(c3797.96,1813.39) P6.34@3825.63,1813.39 ; 3817.53,1832.95 cw(c3797.96,1813.39) P6.34@3825.63,1813.39 ; 3817.53,1832.95 cw(c3797.96,1813.39) P6.34@3825.63,1813.39 ; 3818.9,1844.92 cw(c3808.99,1804.11) P6.34@3849.24,1816.09 ; 3818.9,1844.92 cw(c3808.99,1804.11) P6.34@3849.24,1816.09 ; 3818.9,1844.92 cw(c3808.99,1804.11) P6.34@3849.24,1816.09 ; 3820.48,1838.57 cw(c3813.2,1808.59) P6.34@3843.58,1813.99 ; 3820.48,1838.57 cw(c3813.2,1808.59) P6.34@3843.58,1813.99 ; 3820.48,1838.57 cw(c3813.2,1808.59) P6.34@3843.58,1813.99 ; 3829.04,1842.45 cw(c3820.57,1807.56) P6.34@3854.99,1817.8 ; 3829.04,1842.45 cw(c3820.57,1807.56) P6.34@3854.99,1817.8 ; 3829.04,1842.45 cw(c3820.57,1807.56) P6.34@3854.99,1817.8
PE10: P6.31 U5.41 | length 1152.6
  Top Layer w6: U5.41@3041.31,1938.86 3102.22,1877.95 3652.56,1877.95 3687.99,1913.39 ; P6.31@3740.16,1913.39 3687.99,1913.39 ; U5.41@3062.19,1915.07 cw(c3062.19,1908.06) 3067.15,1913.02 ; U5.41@3062.19,1915.07 cw(c3062.19,1908.06) 3067.15,1913.02 ; U5.41@3062.19,1915.07 cw(c3062.19,1908.06) 3067.15,1913.02 ; U5.41@3065.1,1917.98 ccw(c3072.11,1917.98) 3067.15,1913.02 ; U5.41@3065.1,1917.98 ccw(c3072.11,1917.98) 3067.15,1913.02 ; U5.41@3065.1,1917.98 ccw(c3072.11,1917.98) 3067.15,1913.02 ; 3687.99,1913.39 cw(c3687.99,1875.36) P6.31@3718.72,1897.76 ; 3687.99,1913.39 ccw(c3687.99,1951.41) P6.31@3718.72,1929.01 ; 3687.99,1913.39 ccw(c3687.99,1951.41) P6.31@3718.72,1929.01 ; 3687.99,1913.39 cw(c3687.99,1875.36) P6.31@3718.72,1897.76 ; 3687.99,1913.39 ccw(c3687.99,1951.41) P6.31@3718.72,1929.01 ; 3687.99,1913.39 cw(c3687.99,1875.36) P6.31@3718.72,1897.76 ; 3699.79,1913.39 cw(c3699.79,1883.96) P6.31@3723.57,1901.29 ; 3699.79,1913.39 ccw(c3699.79,1942.81) P6.31@3723.57,1925.48 ; 3699.79,1913.39 ccw(c3699.79,1942.81) P6.31@3723.57,1925.48 ; 3699.79,1913.39 cw(c3699.79,1883.96) P6.31@3723.57,1901.29 ; 3699.79,1913.39 ccw(c3699.79,1942.81) P6.31@3723.57,1925.48 ; 3699.79,1913.39 cw(c3699.79,1883.96) P6.31@3723.57,1901.29
PE11: P6.32 U5.42 | length 2796.3
  Top Layer w6: U5.42@3055.23,1952.78 3117.26,1890.75 3602.36,1890.75 3672.24,1960.63 3794.29,1960.63 ; P6.32@3840.85,1914.07 3794.29,1960.63 ; U5.42@3076.11,1928.99 cw(c3076.11,1921.98) 3081.07,1926.94 ; U5.42@3076.11,1928.99 cw(c3076.11,1921.98) 3081.07,1926.94 ; U5.42@3076.11,1928.99 cw(c3076.11,1921.98) 3081.07,1926.94 ; U5.42@3079.02,1931.9 ccw(c3086.03,1931.9) 3081.07,1926.94 ; U5.42@3079.02,1931.9 ccw(c3086.03,1931.9) 3081.07,1926.94 ; U5.42@3079.02,1931.9 ccw(c3086.03,1931.9) 3081.07,1926.94 ; 3794.29,1960.63 cw(c3747.61,1913.94) P6.32@3813.63,1913.55 ; 3794.29,1960.63 cw(c3747.61,1913.94) P6.32@3813.63,1913.55 ; 3794.29,1960.63 cw(c3747.61,1913.94) P6.32@3813.63,1913.55 ; 3797.22,1957.7 ccw(c3840.16,2000.63) P6.32@3840.16,1939.91 ; 3797.22,1957.7 ccw(c3840.16,2000.63) P6.32@3840.16,1939.91 ; 3797.22,1957.7 ccw(c3840.16,2000.63) P6.32@3840.16,1939.91 ; 3804.45,1950.47 cw(c3767.8,1913.82) P6.32@3819.63,1913.51 ; 3804.45,1950.47 cw(c3767.8,1913.82) P6.32@3819.63,1913.51 ; 3804.45,1950.47 cw(c3767.8,1913.82) P6.32@3819.63,1913.51 ; 3806.05,1942.52 ccw(c3849.73,1953.94) P6.32@3839.36,1910.01 ; 3806.05,1942.52 ccw(c3849.73,1953.94) P6.32@3839.36,1910.01 ; 3806.05,1942.52 ccw(c3849.73,1953.94) P6.32@3839.36,1910.01 ; 3807.47,1947.45 ccw(c3840.16,1980.14) P6.32@3840.16,1933.91 ; 3807.47,1947.45 ccw(c3840.16,1980.14) P6.32@3840.16,1933.91 ; 3807.47,1947.45 ccw(c3840.16,1980.14) P6.32@3840.16,1933.91 ; 3808.58,1932.87 ccw(c3847.13,1942.96) P6.32@3837.98,1904.17 ; 3808.58,1932.87 ccw(c3847.13,1942.96) P6.32@3837.98,1904.17 ; 3808.58,1932.87 ccw(c3847.13,1942.96) P6.32@3837.98,1904.17 ; 3811.1,1923.23 ccw(c3844.54,1931.97) P6.32@3836.6,1898.33 ; 3811.1,1923.23 ccw(c3844.54,1931.97) P6.32@3836.6,1898.33 ; 3811.1,1923.23 ccw(c3844.54,1931.97) P6.32@3836.6,1898.33 ; 3812.74,1939.84 ccw(c3844.01,1948.02) P6.32@3840.44,1915.9 ; 3812.74,1939.84 ccw(c3844.01,1948.02) P6.32@3840.44,1915.9 ; 3812.74,1939.84 ccw(c3844.01,1948.02) P6.32@3840.44,1915.9 ; 3812.87,1947.22 cw(c3801.9,1906.29) P6.32@3843.57,1914.02 ; 3812.87,1947.22 cw(c3801.9,1906.29) P6.32@3843.57,1914.02 ; 3812.87,1947.22 cw(c3801.9,1906.29) P6.32@3843.57,1914.02 ; 3814.61,1940.32 cw(c3787.99,1913.7) P6.32@3825.63,1913.47 ; 3814.61,1940.32 cw(c3787.99,1913.7) P6.32@3825.63,1913.47 ; 3814.61,1940.32 cw(c3787.99,1913.7) P6.32@3825.63,1913.47 ; 3814.95,1931.4 ccw(c3842.98,1938.72) P6.32@3839.77,1909.93 ; 3814.95,1931.4 ccw(c3842.98,1938.72) P6.32@3839.77,1909.93 ; 3814.95,1931.4 ccw(c3842.98,1938.72) P6.32@3839.77,1909.93 ; 3815.67,1940.47 cw(c3807.99,1911.81) P6.32@3837.63,1913.26 ; 3815.67,1940.47 cw(c3807.99,1911.81) P6.32@3837.63,1913.26 ; 3815.67,1940.47 cw(c3807.99,1911.81) P6.32@3837.63,1913.26 ; 3817.71,1937.21 ccw(c3840.16,1959.66) P6.32@3840.16,1927.91 ; 3817.71,1937.21 ccw(c3840.16,1959.66) P6.32@3840.16,1927.91 ; 3817.71,1937.21 ccw(c3840.16,1959.66) P6.32@3840.16,1927.91 ; 3822.06,1944.76 cw(c3812.26,1908.21) P6.32@3849.47,1915.11 ; 3822.06,1944.76 cw(c3812.26,1908.21) P6.32@3849.47,1915.11 ; 3822.06,1944.76 cw(c3812.26,1908.21) P6.32@3849.47,1915.11 ; 3823.62,1938.34 cw(c3816.62,1912.23) P6.32@3843.63,1913.56 ; 3823.62,1938.34 cw(c3816.62,1912.23) P6.32@3843.63,1913.56 ; 3823.62,1938.34 cw(c3816.62,1912.23) P6.32@3843.63,1913.56 ; 3831.25,1942.3 cw(c3822.63,1910.13) P6.32@3855.37,1916.21 ; 3831.25,1942.3 cw(c3822.63,1910.13) P6.32@3855.37,1916.21 ; 3831.25,1942.3 cw(c3822.63,1910.13) P6.32@3855.37,1916.21
PE12: P6.29 U5.43 | length 1157.1
  Top Layer w6: U5.43@3069.15,1966.7 3133.1,1902.75 3577.35,1902.75 3687.99,2013.39 ; P6.29@3740.16,2013.39 3687.99,2013.39 ; U5.43@3090.03,1942.91 cw(c3090.03,1935.9) 3094.99,1940.86 ; U5.43@3090.03,1942.91 cw(c3090.03,1935.9) 3094.99,1940.86 ; U5.43@3090.03,1942.91 cw(c3090.03,1935.9) 3094.99,1940.86 ; U5.43@3092.93,1945.82 ccw(c3099.95,1945.82) 3094.99,1940.86 ; U5.43@3092.93,1945.82 ccw(c3099.95,1945.82) 3094.99,1940.86 ; U5.43@3092.93,1945.82 ccw(c3099.95,1945.82) 3094.99,1940.86 ; 3687.99,2013.39 cw(c3687.99,1975.36) P6.29@3718.72,1997.76 ; 3687.99,2013.39 ccw(c3687.99,2051.41) P6.29@3718.72,2029.01 ; 3687.99,2013.39 ccw(c3687.99,2051.41) P6.29@3718.72,2029.01 ; 3687.99,2013.39 cw(c3687.99,1975.36) P6.29@3718.72,1997.76 ; 3687.99,2013.39 ccw(c3687.99,2051.41) P6.29@3718.72,2029.01 ; 3687.99,2013.39 cw(c3687.99,1975.36) P6.29@3718.72,1997.76 ; 3699.79,2013.39 cw(c3699.79,1983.96) P6.29@3723.57,2001.29 ; 3699.79,2013.39 ccw(c3699.79,2042.81) P6.29@3723.57,2025.48 ; 3699.79,2013.39 ccw(c3699.79,2042.81) P6.29@3723.57,2025.48 ; 3699.79,2013.39 cw(c3699.79,1983.96) P6.29@3723.57,2001.29 ; 3699.79,2013.39 ccw(c3699.79,2042.81) P6.29@3723.57,2025.48 ; 3699.79,2013.39 cw(c3699.79,1983.96) P6.29@3723.57,2001.29